# Altium PCB Driver Dir.PcbDoc
Units mm, origin at the board's own origin, x right, y up, seen from the top; angles counter-clockwise.
Board outline 13.18 x 27.78 mm, 2 copper layers (Top Layer, Bottom Layer); 14 components, 11 nets, 49 pads, 11 vias.
Unrouted connection lines stored in the file: 1.
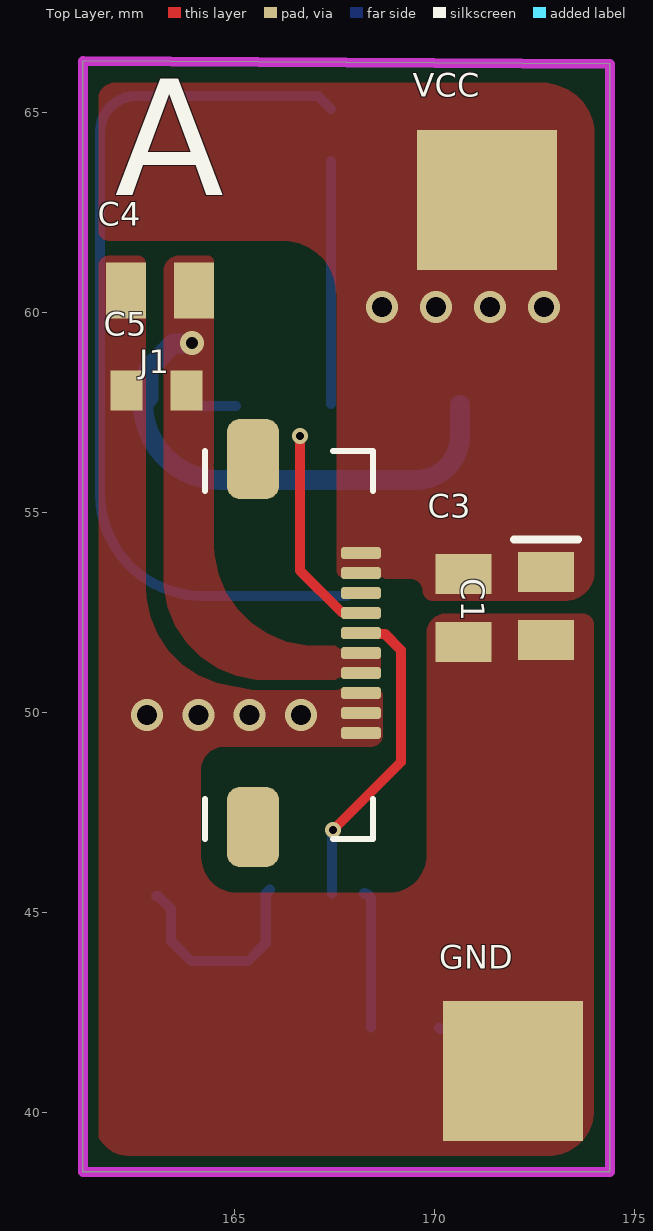
[diagram p0: Top Layer view]
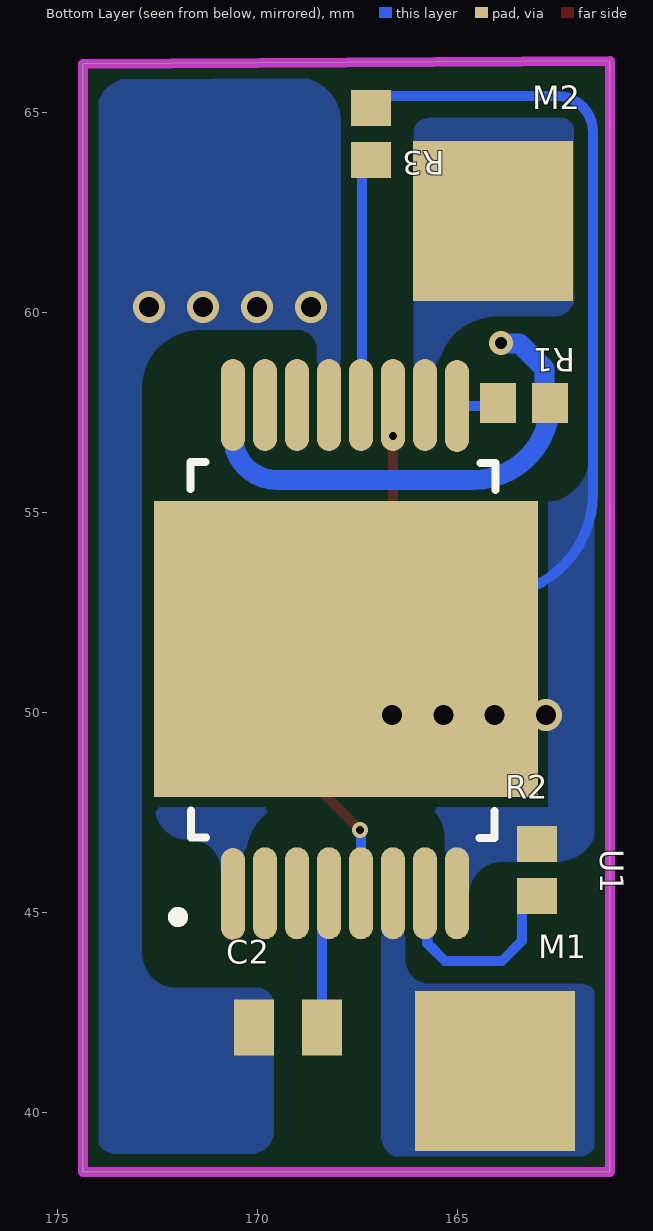
[diagram p1: Bottom Layer view, seen from below]
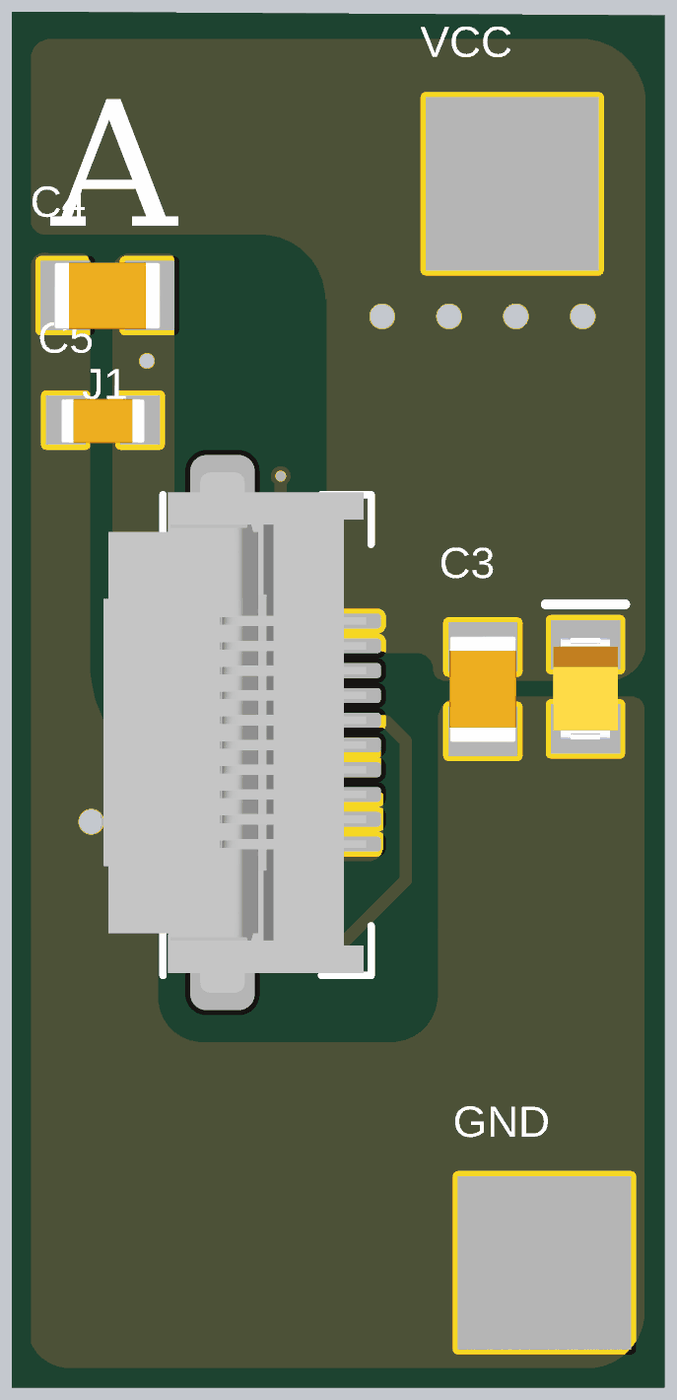
[diagram p2: 3D render of the assembled board from above, using the file's embedded part models]
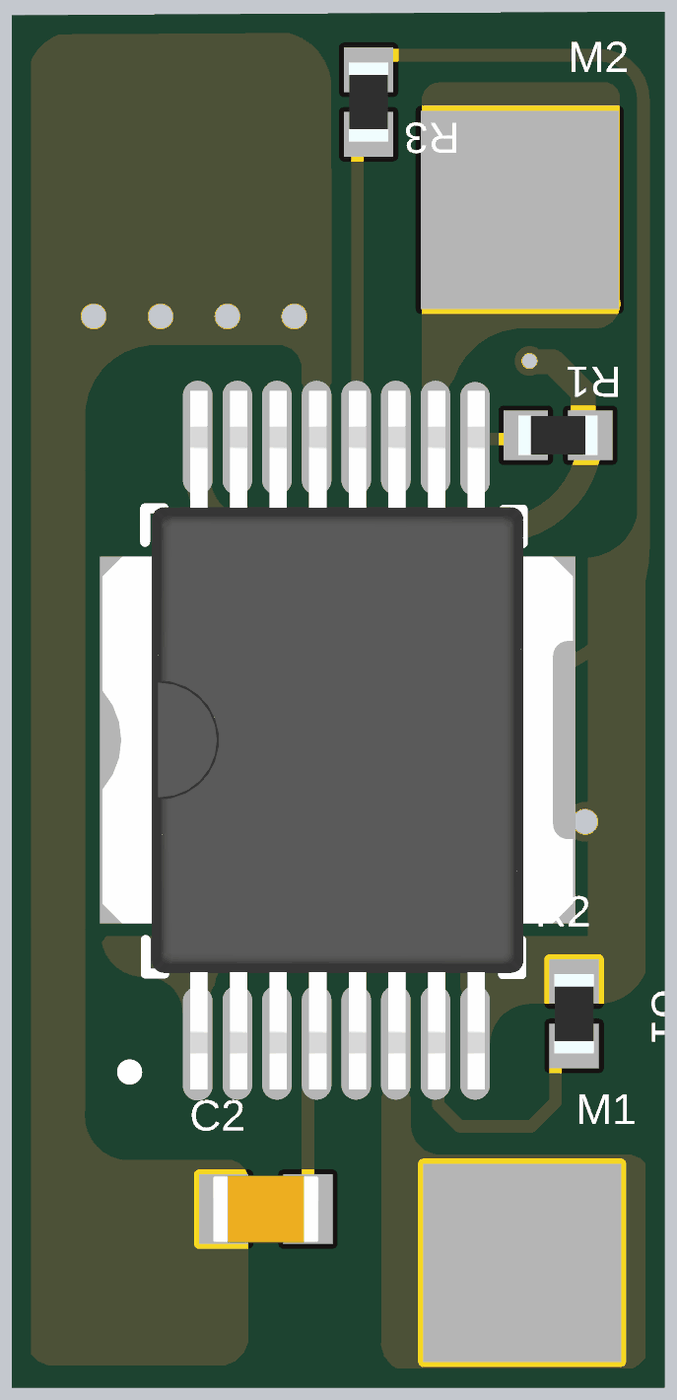
[diagram p3: 3D render of the assembled board from below, using the file's embedded part models]

## Layer stack, top to bottom
Top Solder: solder mask 0.0102, Solder Resist, Dk 3.5
Top Layer: signal copper 0.0356
Dielectric 1: dielectric 0.32, FR-4, Dk 4.8
Bottom Layer: signal copper 0.0356
Bottom Solder: solder mask 0.0102, Solder Resist, Dk 3.5

## Board outline
161.2,38.525 174.375,38.525 174.375,66.225 161.2,66.3

## Design rules (kind name [scope] priority, off if disabled: settings)
Clearance [All] p1: gap=0.254 ignorepadtopadclearanceinfootprint=FALSE except(0: Arc-Hole Track-Hole SMDPad-Hole THPad-Hole Via-Hole Fill-Hole Poly-Hole Region-Hole Text-Hole; 0.127: Arc-Arc Arc-Track Arc-SMDPad Track-Track Track-SMDPad SMDPad-SMDPad)
PlaneConnect [All] p1: planeconnectstyle=Direct reliefexpansion=0.508 reliefentries=4 reliefconductorwidth=0.254 reliefairgap=0.254
PolygonConnect [All] p1: connectstyle=Direct reliefconductorwidth=0.254 reliefentries=4 polygonreliefangle="90 Angle" airgapwidth=0.254
RoutingVias [All] p1: holewidth=0.711 width=1.27 viastyle="Through Hole" minholewidth=0.711 minwidth=1.27 maxholewidth=0.711 maxwidth=1.27
SolderMaskExpansion [All] p1: expansion=0.102 istentingtop=FALSE
Width [All] p1: maxlimit=1 minlimit=0.245 preferedwidth=0.254 bottomlayer_minwidth=0.254 minimp=50.000000 maximp=50.000000 favimp=50.000000
29 further rules are at their usual default settings.

## Components (designator, comment, footprint, x,y, rotation, side; value= is the part's Value field where it differs from the comment)
C1 "100uF" "TANTALUM C0805" 172.8,52.7 r270 top
C2 "0.1uF" C0805 169.25,42.125 r0 bottom
C3 "1 uF" C0805 170.7,52.625 r90 top
C4 "0.1uF" C0805 163.125,60.575 r0 top
C5 "10 uF" C0603 163.05,58.075 r0 top
GND "Ground Pad" PAD_ALIMENTAÇÃO_MINI 171.95,41.05 r0 top (schematic designator GND1)
J1 "505278-1033" FPC_CON 166.55,51.75 r270 top
M1 "Motor Pad" PAD_MOTOR_MINI 164.075,41.05 r180 bottom
M2 "Motor Pad" PAD_MOTOR_MINI 164.125,62.3 r180 bottom
R1 "22 kOhms" RESISTOR_0603 163.35,57.75 r0 bottom
R2 "22 kOhms" RESISTOR_0603 163.025,46.075 r270 bottom
R3 "10 kOhm" RESISTOR_0603 167.175,64.475 r270 bottom
U1 "L9958SBTR" "POWERSO16 (16_PINS)" 167.775,51.6 r90 bottom
VCC "Source Pad" PAD_ALIMENTAÇÃO_MINI 171.3,62.825 r180 top (schematic designator VCC1)

## Footprints (in the part's own frame and the unit in brackets; to place one, negate y for a bottom-side part, rotate by r counter-clockwise, add the part's x,y. Pads: shape width x height; smd on the part's side, far side on the other; paste and mask are expansions set on the pad)
C0603 [mm]
  rect 0.8x1 smd: 1(-0.763,-0.018) 2(0.737,-0.018)
  body extent -0.86,-0.49 0.84,0.41, height 0.8
C0805 [mm]
  rect 1x1.4 smd: 1(-0.85,-0.008) 2(0.85,-0.008)
  body extent -1.07,-0.68 1.07,0.67, height 0.9
FPC_CON [mm] "Small Outline IC (SOIC), 1.27 mm pitch; 8 pin, 4.90 mm L X 3.90 mm W X 1.75 mm H body"
  rrect50% 0.3x1 smd: 1(-2.25,1.6) 2(-1.75,1.6) 3(-1.25,1.6) 4(-0.75,1.6) 5(-0.25,1.6) 6(0.25,1.6) 7(0.75,1.6) 8(1.25,1.6) 9(1.75,1.6) 10(2.25,1.6)
  rrect50% 2x1.3 smd: MP1(-4.6,-1.1) MP2(4.6,-1.1)
  silkscreen extent -4.8,-2.3 4.9,1.9, body extent -5.25,-3.5 5.25,1.8, height 1.88
PAD_ALIMENTAÇÃO_MINI [mm]
  rect 3.5x3.5 smd: A(0,0)
PAD_MOTOR_MINI [mm]
  rect 4x4 smd: M(0,0)
"POWERSO16 (16_PINS)" [mm] "POWERSO16 (16_PINS)"
  oval 2.3x0.6 smd paste+0 mask+0: 1(-6.125,2.85) 2(-6.108,2.05) 3(-6.108,1.25) 4(-6.108,0.45) 5(-6.108,-0.35) 6(-6.108,-1.15) 7(-6.108,-1.95) 8(-6.108,-2.75) 9(6.075,-2.75) 10(6.1,-1.95) 11(6.1,-1.15) 12(6.1,-0.35) 13(6.1,0.45) 14(6.1,1.25) 15(6.1,2.05) 16(6.1,2.85)
  rect 7.4x9.6 smd paste+0 mask+0: 17(0,0.025)
  silkscreen extent -6.8,-3.71 4.68,4.33, body extent -7.05,-4.72 7.05,4.78
RESISTOR_0603 [mm]
  rect 0.9x1 smd: 1(-0.65,0) 2(0.65,0)
  body extent -0.8,-0.4 0.8,0.4, height 0.55
"TANTALUM C0805" [mm]
  rect 1x1.4 smd: 1(-0.824,-0.02) 2(0.876,-0.02)
  silkscreen extent -1.64,-0.82 -1.64,0.78, body extent -0.96,-0.67 1.09,0.63, height 1.2

## Part data
C1: library part F980J107MSA, "CAP TAN 100uF 6.3V 0805", Manufacturer=AVX, Operating Temperature="-55 C ~ 125 C", Package / Case="0805 (2012 Metric)", Supplier Part Number 1=581-F980J107MSA, Tolerance=20%, Voltage - Rated=6.3V, Category="Tantalum Capacitor", ComponentLink1Description=Datasheet, ComponentLink1URL=https://br.mouser.com/datasheet/2/40/AVX_F98%20DTSH%2008_16-1158749.pdf, ComponentLink2Description="Mouser Link", ComponentLink2URL=https://br.mouser.com/ProductDetail/AVX/F980J107MSA?qs=%2Fha2pyFaduiqmyJM1RWxJ6tWf%252BqxluChd36%252Bz6k56%252ByF7CmEPS5MIQ%3D%3D, Dieletric=Tantalum, ESR="8 Ohms using (100kHz)", Library Control - Checked Footprint=Yes, Library Control - Checked Schematic=Yes, Library Control - Last Update="27/06/2021 23:37", Library Control - Person that Checked Footprint=Nikaum, Library Control - Person that Checked Schematic=Nikaum, Library Control - Person that did the Last Update Footprint=Nikaum, Library Control - Person that did the Last Update Schematic=Nikaum, Library Ref=Capacitor, Part Number=F980J107MSA, Price="1=0.87, 10=0.646, 100=0.443 (USD)", Size / Dimension="2,00 L x 1,25 W x 0,80 H", Supplier 1=Mouser
C2 C4: library part C0805C104M3RACTU, "CAP CER 100nF 25V X7R 0805", Manufacturer=Kemet, Operating Temperature="-55 C ~ 125 C", Package / Case="0805(2012 mestric)", Supplier Part Number 1=80-C0805C104M3R, Tolerance=20%, Voltage - Rated="25 VDC", Category="Ceramic Capacitor", ComponentLink1Description=Datasheet, ComponentLink1URL=https://br.mouser.com/datasheet/2/212/KEM_C1002_X7R_SMD-1102033.pdf, ComponentLink2Description="Mouser Link", ComponentLink2URL=https://br.mouser.com/ProductDetail/KEMET/C0805C104M3RACTU?qs=jbCUrP3sAgSIdMuvv9W4Pg%3D%3D, Dieletric=X7R, ESR=-, Library Control - Checked Footprint=Yes, Library Control - Checked Schematic=Yes, Library Control - Last Update=25/08/22, Library Control - Person that Checked Footprint=Cage, Library Control - Person that Checked Schematic=Cage, Library Control - Person that did the Last Update Footprint=Cage, Library Control - Person that did the Last Update Schematic=Cage, Library Ref=Capacitor, Part Number=C0805C104M3RACTU, Price="1=0,13 10=0,064 100=0,037 1000=0,025 (USD)", Size / Dimension="1.25 mm W x 2 mm L x 0.78 mm H", Supplier 1=Mouser
C3: library part 08051C105K4T2A, "CAP CER 1uF 100V X7R 0805", Manufacturer="KYOCERA AVX", Operating Temperature="-55°C ~125ºC", Package / Case="0805(2012 Metric)", Supplier Part Number 1=581-08051C105K4T2A, Tolerance=10%, Voltage - Rated="100 VDC", Category="Ceramic capacitor", ComponentLink1Description=Datasheet, ComponentLink1URL=https://br.mouser.com/datasheet/2/40/AutoMLCC-777028.pdf, ComponentLink2Description="Mouser Link", ComponentLink2URL=https://br.mouser.com/ProductDetail/KYOCERA-AVX/08051C105K4T2A?qs=BZBei1rCqCBHLdlOVwQkfA%3D%3D, Dieletric=X7R, ESR=-, Library Control - Checked Footprint=Yes, Library Control - Checked Schematic=Yes, Library Ref=Capacitor, Part Number=08051C105K4T2A, Price="1=0,41 10=0,283 100=0,169 1000=0,107 (USD)", Size / Dimension="2 mm L  x 1.25 mm W x 1.25 mm H", Supplier 1=Mouser
C5: library part C1608X5R1E106M080AC, "CAP CER 10uF 25V X5R 0603", Manufacturer=TDK, Operating Temperature="-55 C ~ 85 C", Package / Case="0603 (1608 Metric)", Supplier Part Number 1=810-C1608X5R1E106M, Tolerance=20%, Voltage - Rated="25 VDC", Category="Ceramic Capacitor", ComponentLink1Description=Datasheet, ComponentLink1URL=https://product.tdk.com/system/files/dam/doc/product/capacitor/ceramic/mlcc/catalog/mlcc_commercial_general_en.pdf, ComponentLink2Description="Mouser Link", ComponentLink2URL=https://br.mouser.com/ProductDetail/TDK/C1608X5R1E106M080AC?qs=dfay7wIA1uGdHfZTkqsICA%3D%3D, ComponentLink3Description=ESR, ComponentLink3URL=https://product.tdk.com/en/search/capacitor/ceramic/mlcc/info?part_no=C1608X5R1E106M080AC, Dieletric=X5R, Library Control - Checked Footprint=Yes, Library Control - Checked Schematic=Yes, Library Control - Last Update="28/06/2021 00:27", Library Control - Person that Checked Footprint=Nikaum, Library Control - Person that Checked Schematic=Nikaum, Library Control - Person that did the Last Update Footprint=Nikaum, Library Control - Person that did the Last Update Schematic=Nikaum, Library Ref=Capacitor, Part Number=C1608X5R1E106M080AC, Price="1= 0,82, 10= 0,581, 100= 0,382 (USD)", Size / Dimension="1,60 L x 0,80 W x 0,80 H", Supplier 1=MOUSER
GND: library part "Ground Pad Mini Sumô", "GND PAD MINI SUMÔ", Cable AWG="20 / 18 (AWG)", Library Ref=Pads, Recomended Category="Mini Sumô", Size="3.5 x 3.5 (mm)"
J1: library part 505278-1033_BODY, "CONN FFC/FPC HORZ 10POS 0.50MM", Current Rating (Amps)=500mA, Manufacturer=Molex, Operating Temperature="-40°C ~ 85°C", Supplier Part Number 1=538-505278-1033, Category=Connectors, ComponentLink1Description=Datasheet, ComponentLink1URL=https://br.mouser.com/datasheet/2/276/2/5052781033_FFC_FPC_CONNECTORS-772019.pdf, ComponentLink2Description="Mouser Link", ComponentLink2URL=https://br.mouser.com/ProductDetail/Molex/505278-1033?qs=c8NFF48pVsDStgrQCBOSTg%3D%3D, Contact Length - Mating=0.50mm, Contact Material=Tin, Contact Type=FFC/FPC, Insulation Material="Liquid Crystal Polymer", Library Control - Checked Footprint=Yes, Library Control - Checked Schematic=Yes, Library Control - Last Project that Used=Follow-Final, Library Control - Last Update="24/04/2021 00:25", Library Control - Person that Checked Footprint=Lucas, Library Control - Person that Checked Schematic=Lucas, Library Control - Person that did the Last Update Footprint=Mateus(Dimas), Library Control - Person that did the Last Update Schematic=Mateus(Dimas), Library Ref=Connectors, Mounting Type="Right Angle", Number of Positions=10, Number of Rows=1, Part Number=505278-1033, Pitch=0.50mm, Price="1=0,51000, 10=0,42900, 100=0,33400 (USD)", Supplier 1=Mouser, Termination=SMD
M1 M2: library part "Motor Pad Mini Sumô", "MOTOR PAD MINI SUMÔ", Cable AWG="20 / 18 (AWG)", Library Ref=Pads, Recomended Category="Mini Sumô", Size="3.5 x 3.5 (mm)"
R1 R2: library part CRGH0603F22K, "RES SMD 22K OHM 1% 1/5W 0603", Manufacturer="TE Connectivity / Holsworthy", Operating Temperature=-55C~155C, Package / Case="0603 (1608 metric)", Power Rating="200 mW (1/5 W)", Resistor Type=Fixo, Supplier Part Number 1=279-CRGH0603F22K, Temperature Coefficient="100 PPM / C", Tolerance=1%, Voltage Rating="50 V", Category="Thick Film Resistors", ComponentLink1Description="Mouser Link", ComponentLink1URL=https://br.mouser.com/ProductDetail/TE-Connectivity-Holsworthy/CRGH0603F22K?qs=j1jvDfvplqKqyIzG56xhJw%3D%3D, ComponentLink2Description=Datasheet, ComponentLink2URL=https://br.mouser.com/datasheet/2/418/6/ENG_DS_1773204_1_F-1140248.pdf, Library Ref=Resistor, Part Number=CRGH0603F22K, Price="1= 0.10, 10= 0.07, 100= 0.027 (USD)", Size / Dimension="0.45 mm x 1.6 mm x 0.8 mm (HxLxW)", Supplier 1=Mouser
R3: library part CRCW060310K0FKEBC, "RES SMD 10 kOHM 1% 1/10W 0603", Manufacturer=Vishay, Operating Temperature="- 55 C~155 C", Package / Case="0603 (1608 metric)", Power Rating="100mW (1/10 W)", Resistor Type=Fixo, Supplier Part Number 1=71-CRCW060310K0FKEBC, Temperature Coefficient="100 PPM / C", Tolerance="1 %", Voltage Rating="75 V", Category="Thick Film Resistors - SMD", ComponentLink1Description="Mouser Link", ComponentLink1URL=https://br.mouser.com/ProductDetail/Vishay-Dale/CRCW060310K0FKEBC?qs=wd5RIQLrsJiqANp9xmDb7A%3D%3D, ComponentLink2Description="Datasheet Link", ComponentLink2URL=https://br.mouser.com/datasheet/2/427/crcwce3-1762584.pdf, Library Ref=Resistor, Part Number=CRCW060310K0FKEBC, Price="1 = 0,10, 10 = 0,032, 100 = 0,013 (USD)", Size / Dimension="1,60 L x 0,80 W x 0,45 H", Supplier 1=Mouser
U1: "IC MTR DRV (4V ~ 28V) (100 uA) POWERSO 16", Current - Output="100 uA", Current - Peak Output (Source/Sink)="5 uA / 100 uA", Logic Voltage - VIL, VIH="VIL = (-0.3 V ~ 0.8 V) / VIH = (2 V ~ VDD + 0.3 V)", Manufacturer=ST, Operating Supply Current="20 uA", Operating Temperature="-40°C ~ 150°C", Package / Case="POWERSO 16", Power Dissipation="625 mW", Rds On - Drain-Source Resistance="300 mOhms", Supplier Part Number 1=511-L9958SBTR, Voltage - Load="4V ~ 28V", Voltage - Supply="4.5 V ~ 5.5 V", Category=Driver, ComponentLink1Description="Mouser Link / ST Link", ComponentLink1URL=https://estore.st.com/en/l9958sbtr-cpn.html, ComponentLink2Description=Datasheet, ComponentLink2URL=https://www.st.com/resource/en/datasheet/l9958.pdf, Library Control - Checked Footprint=Yes, Library Control - Checked Schematic=Yes, Library Control - Last Update="21/06/2021 12:25", Library Control - Person that Checked Footprint=Pierre, Library Control - Person that Checked Schematic=Pierre, Library Control - Person that did the Last Update Footprint=Stéfany(Ster), Library Control - Person that did the Last Update Schematic=Pierre, Library Ref=Driver, Logic (IN-SD/High Low)=IN-SD, Output Configuration="Half Bridge (2)", Part Number=L9958SBTR, Price="1=5,51000, 10=4,95000, 100=4,06000 (USD)", Rise / Fall Time (Typ)="0.2 us / 3 us", Suplier Part Number 2=L9958SBTR, Supplier 1=Mouser, Technology="Power MOSFET"
VCC: library part "Source Pad Mini Sumô", "VCC PAD MINI SUMÔ", Cable AWG="20 / 18 (AWG)", Library Ref=Pads, Recomended Category="Mini Sumô", Size="3.5 x 3.5 (mm)"

## Via types
v1: diameter 0.8, hole 0.5, Top Layer to Bottom Layer, tented both sides, 8 vias
v2: diameter 0.4, hole 0.2, Top Layer to Bottom Layer, tented both sides, 2 vias
v3: diameter 0.6, hole 0.3, Top Layer to Bottom Layer, tented both sides, 1 vias

## Nets (pads, with @x,y where several pads share a name; then routed paths per layer and width w, separated by ;. In a path a pad name is that pad's centre, name@x,y a point inside that pad or via, vN(x,y) a via of type N, cw(c..) or ccw(c..) an arc to the next point about the centre after c; other vN are vias at no path point)
BAT: C1.1 C2.2 C3.2 J1.1 J1.2 U1.13 VCC.A | length 0
  Bottom Layer w0.254: C2.2 C2.2@170.133,42.1
  other v1: 168.675,60.15 170.025,60.15 171.375,60.15 172.725,60.15
CP: C2.1 U1.4 | length 3.5
  Bottom Layer w0.254: U1.4 cw(c168.225,45.317) 168.4,45.317 C2.1
DI: R2.2 U1.7 | length 5.5
  Bottom Layer w0.254: R2.2 163.075,45.425 163.398,45.102 163.398,44.302 163.9,43.8 165.325,43.8 165.769,44.244 165.769,45.481 U1.7@165.87,45.583
DIR: J1.5 U1.5 | length 8
  Top Layer w0.254: v2(167.45,47.075) 169.15,48.775 169.15,51.571 168.744,51.977 168.173,51.977 J1.5
  Bottom Layer w0.254: U1.5 167.425,47.05 cw(c167.45,47.05) v2(167.45,47.075)
EN: R1.2 U1.9 | length 1.1
  Bottom Layer w0.254: R1.2 ccw(c164.075,57.75) 164.075,57.675 U1.9
GND: C1.2 C3.1 C4.1 C5.1 GND.A J1.8 J1.9 J1.10 R2.1 R3.1 U1.1 U1.8 | length 23.1
  Bottom Layer w0.254: R3.1@167.4,65.1 167.077,65.423 162.523,65.423 ccw(c162.523,64.525) 161.625,64.525 161.625,55.49 ccw(c164.19,55.49) 164.19,52.925 167.8,52.925
  other v1: 162.8,49.95 164.083,49.95 165.367,49.95 166.65,49.95
OUT1: M1.M U1.6
OUT2: M2.M U1.10
PWM: J1.4 U1.11 | length 5.3
  Top Layer w0.254: v2(166.625,56.925) 166.625,53.56 167.662,52.523 168.127,52.523 J1.4
REXT: R3.2 U1.12 | length 6.1
  Bottom Layer w0.254: U1.12@167.4,57.727 R3.2@167.4,63.8
VDD: C4.2 C5.2 J1.6 J1.7 R1.1 U1.16 | length 12.7
  Bottom Layer w0.5: v3(163.925,59.25) 163.908,59.233 163.458,59.233 162.843,58.618 162.843,57.893 R1.1 ccw(c164.625,57.75) 164.625,55.825 169.525,55.825 ccw(c169.525,56.925) 170.625,56.925 U1.16
pads on no net: J1.3 J1.MP1 J1.MP2 U1.2 U1.3 U1.14 U1.15 U1.17

## Polygon pours and split planes (outlines as drawn)
OUT2 on Bottom Layer "OUT2_L02_P007" (solid, pour order 7): 166.1,58.425 166.1,64.5 ccw(c165.725,64.5) 165.725,64.875 162.425,64.875 ccw(c162.425,64.55) 162.1,64.55 162.1,60.5 ccw(c162.606,60.419) 162.525,59.912 164.038,59.912 cw(c164.038,58.425) 165.525,58.425
BAT on Bottom Layer "BAT_L02_P009" (solid, pour order 9): 168.525,58.025 168.525,59.1 cw(c169,59.1) 169,59.575 171.425,59.575 cw(c171.463,58.138) 172.9,58.175 172.9,44.125 cw(c172.013,44.012) 172.125,43.125 170.025,43.125 ccw(c170.025,42.7) 169.6,42.7 169.6,39.575 ccw(c170.2,39.575) 170.2,38.975 173.525,38.975 ccw(c173.525,39.525) 174.075,39.525 174.075,64.9 ccw(c173.075,64.9) 173.075,65.9 169.075,65.9 ccw(c169.075,64.75) 167.925,64.75 167.925,58.175
GND on Bottom Layer "GND_L02_P008" (solid, pour order 8): 163.3,55.275 162.825,55.275 cw(c162.825,56.375) 161.725,56.375 161.6,56.375 ccw(c161.6,56.275) 161.5,56.275 161.5,47.325 ccw(c162.55,47.325) 162.55,46.275 163.9,46.275 cw(c163.9,45.45) 164.725,45.45 164.725,44.8 ccw(c165.05,44.8) 165.05,44.475 ccw(c165.05,44.75) 165.325,44.75 165.325,46.85 cw(c166.375,46.85) 166.375,47.9 168.75,47.9 cw(c168.75,46.325) 170.325,46.325 170.325,46.2 ccw(c170.625,46.2) 170.625,45.9 170.75,45.9 ccw(c170.75,46.075) 170.925,46.075 cw(c171.675,46.075) 171.675,46.825 171.725,46.825 ccw(c171.725,47.675) 172.575,47.675 172.575,48
OUT1 on Bottom Layer "OUT1_L02_P001" (solid, pour order 1): 166.318,45.482 166.318,43.807 cw(c165.743,43.807) 165.743,43.232 161.968,43.232 ccw(c161.968,42.732) 161.468,42.732 161.468,39.507 ccw(c162.118,39.507) 162.118,38.857 166.393,38.857 ccw(c166.329,39.442) 166.915,39.507 166.915,45.278 ccw(c166.619,45.278) 166.619,45.574
BAT on Top Layer "BAT_L01_P018" (solid, pour order 18): 168.204,65.75 162,65.75 ccw(c162,65.325) 161.575,65.325 161.575,62.1 ccw(c161.875,62.1) 161.875,61.8 166.225,61.8 cw(c166.225,60.5) 167.525,60.5 168.385,60.5 ccw(c168.385,63.04) 170.925,63.04 170.925,63.2
GND on Top Layer "GND_L01_P017" (solid, pour order 17): 161.588,56.257 161.588,61.225 cw(c161.857,61.157) 161.925,61.425 162.575,61.425 cw(c162.575,61.225) 162.775,61.225 162.775,55.9
VDD on Top Layer "VDD_L01_P015" (solid, pour order 15): 164.475,56.145 164.475,61.275 ccw(c164.325,61.275) 164.325,61.425 163.6,61.425 ccw(c163.6,61.05) 163.225,61.05 163.225,56.185
GND on Top Layer "GND_L01_P013" (solid, pour order 13): 173.975,52.2 ccw(c173.7,52.2) 173.7,52.475 170.275,52.475 ccw(c170.275,52) 169.8,52 169.8,46.45 cw(c168.85,46.45) 168.85,45.5 165.05,45.5 cw(c165.05,46.4) 164.15,46.4 164.15,48.6 cw(c164.7,48.6) 164.7,49.15 168.375,49.15 ccw(c168.375,49.475) 168.7,49.475 168.7,50.475 ccw(c168.525,50.475) 168.525,50.65 165.25,50.65 cw(c165.25,53.125) 162.775,53.125 162.775,56.125 ccw(c162.6,56.125) 162.6,56.3 161.725,56.3 ccw(c161.725,56.075) 161.5,56.075 161.5,39.8 ccw(c162.375,39.8) 162.375,38.925 172.825,38.925 ccw(c172.825,40.075) 173.975,40.075
VDD on Top Layer "VDD_L01_P012" (solid, pour order 12): 168.65,51.55 ccw(c168.525,51.55) 168.525,51.675 167.015,51.675 cw(c167.015,54.215) 164.475,54.215 164.475,56.1 ccw(c164.25,56.1) 164.25,56.325 163.4,56.325 ccw(c163.4,56.15) 163.225,56.15 163.225,53.39 ccw(c165.783,53.382) 165.775,50.825 168.55,50.825 ccw(c168.538,50.937) 168.65,50.95
BAT on Top Layer "BAT_L01_P011" (solid, pour order 11): 170.85,52.8 169.95,52.8 cw(c169.95,53.05) 169.7,53.05 ccw(c169.4,53.05) 169.4,53.35 167.775,53.35 cw(c167.775,53.575) 167.55,53.575 167.55,65.025 cw(c168.275,65.025) 168.275,65.75 172.675,65.75 cw(c172.675,64.425) 174,64.425 174,53.575 cw(c173.238,53.562) 173.25,52.8

## Keep-outs
Keep-Out Layer:
  the board outline again, w0.254

## Silkscreen, mask and mechanical layers (free items; w line width, h text height)
Top Overlay:
  text "A" at 161.995,61.98 h5
BoardOutLine:
  the board outline again, w0.254